# Altium PCB Hydrated_Buffs.PcbDoc
Units mil, origin at the board's own origin, x right, y up, seen from the top; angles counter-clockwise.
Board outline 3496 x 3557 mil, 2 copper layers (Top Layer, Bottom Layer); 108 components, 72 nets, 359 pads, 215 vias.
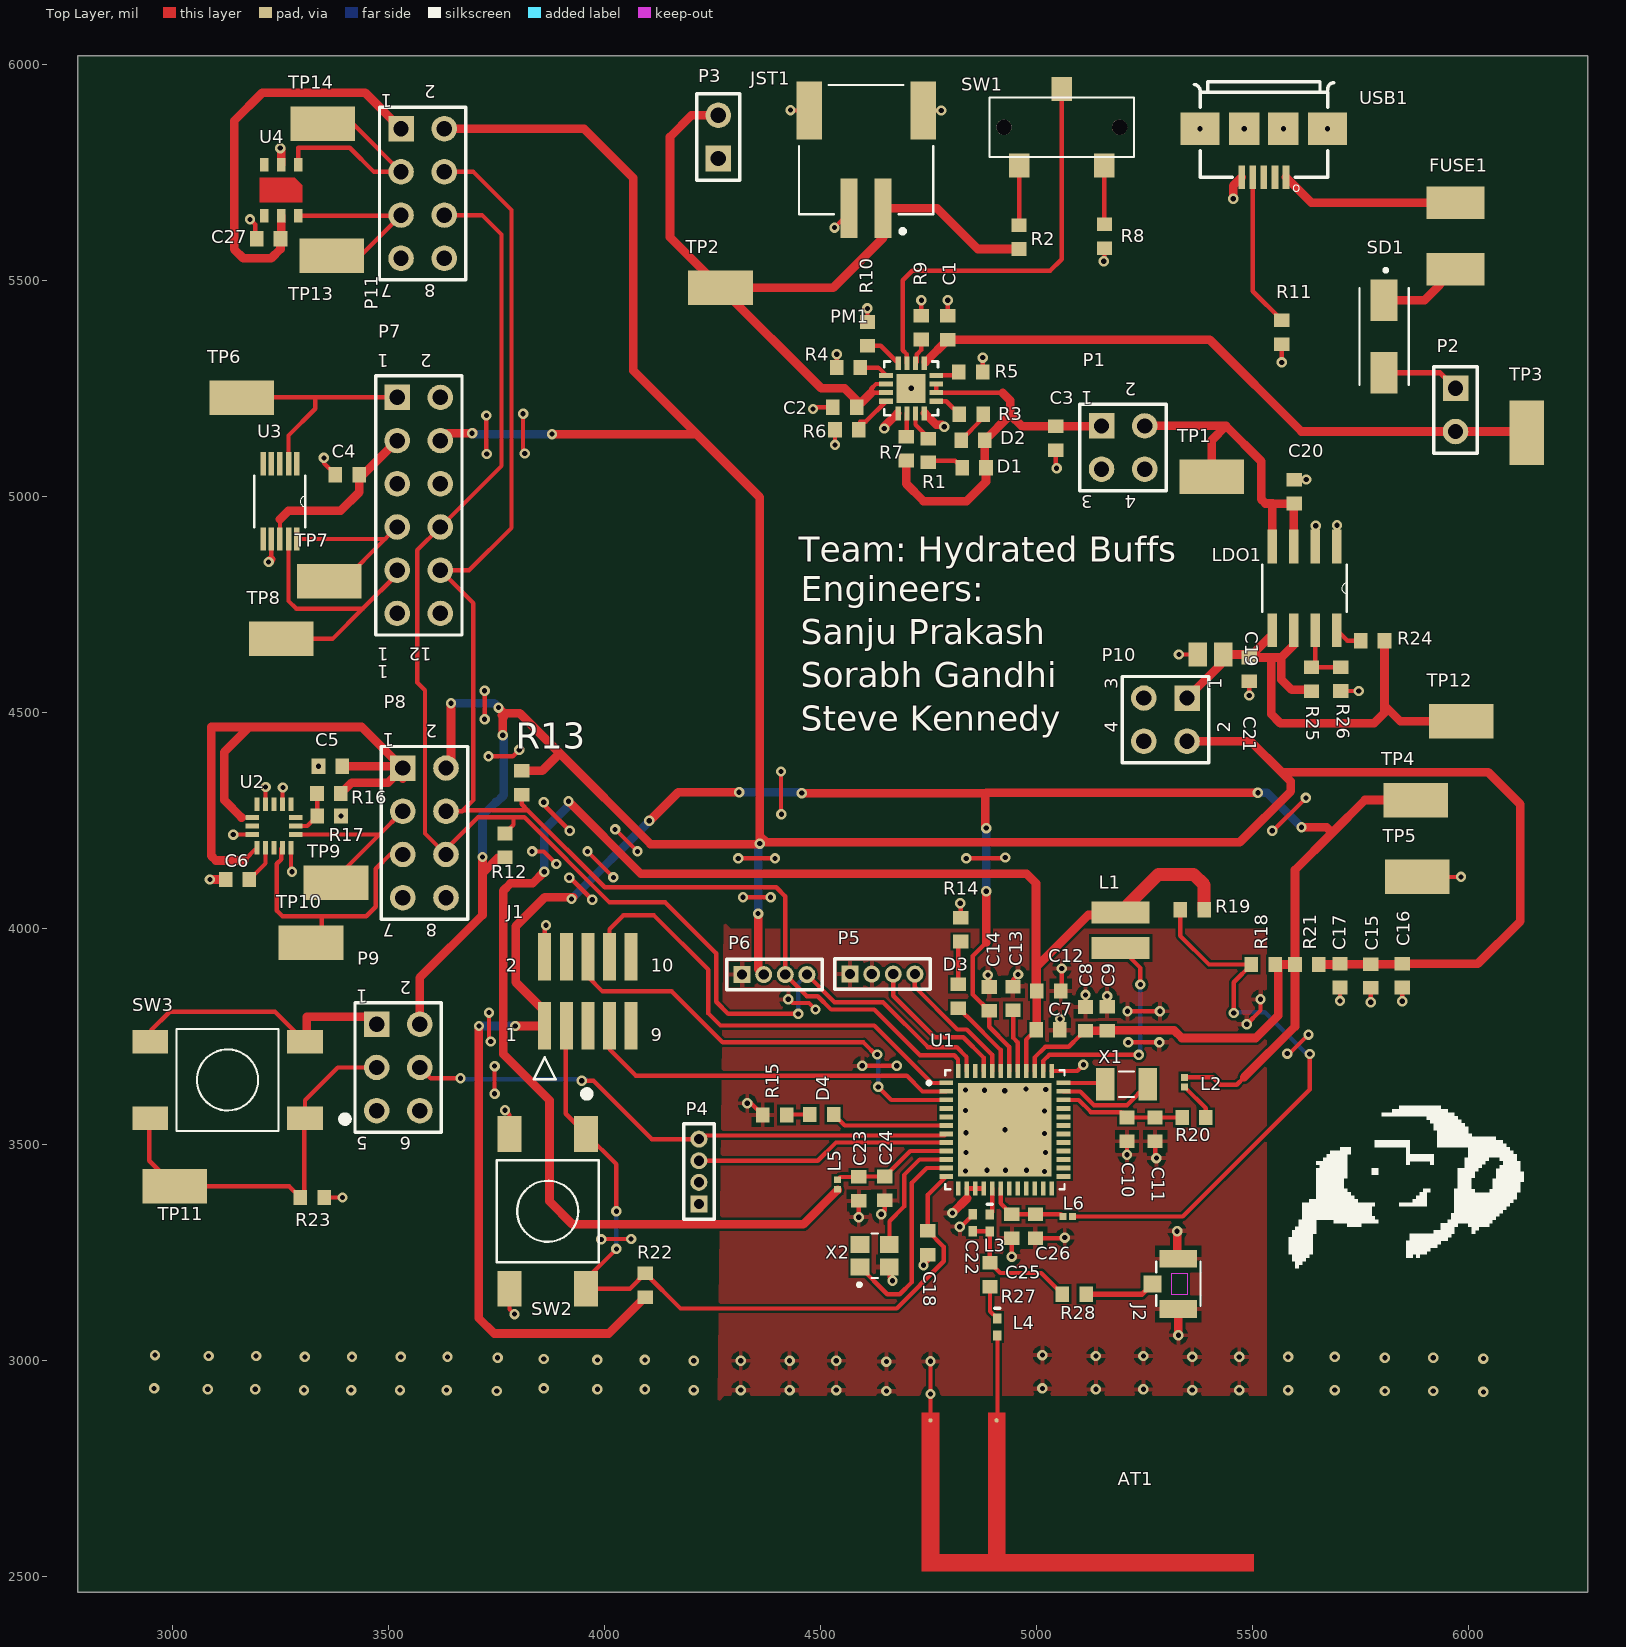
[diagram p0: Top Layer view]
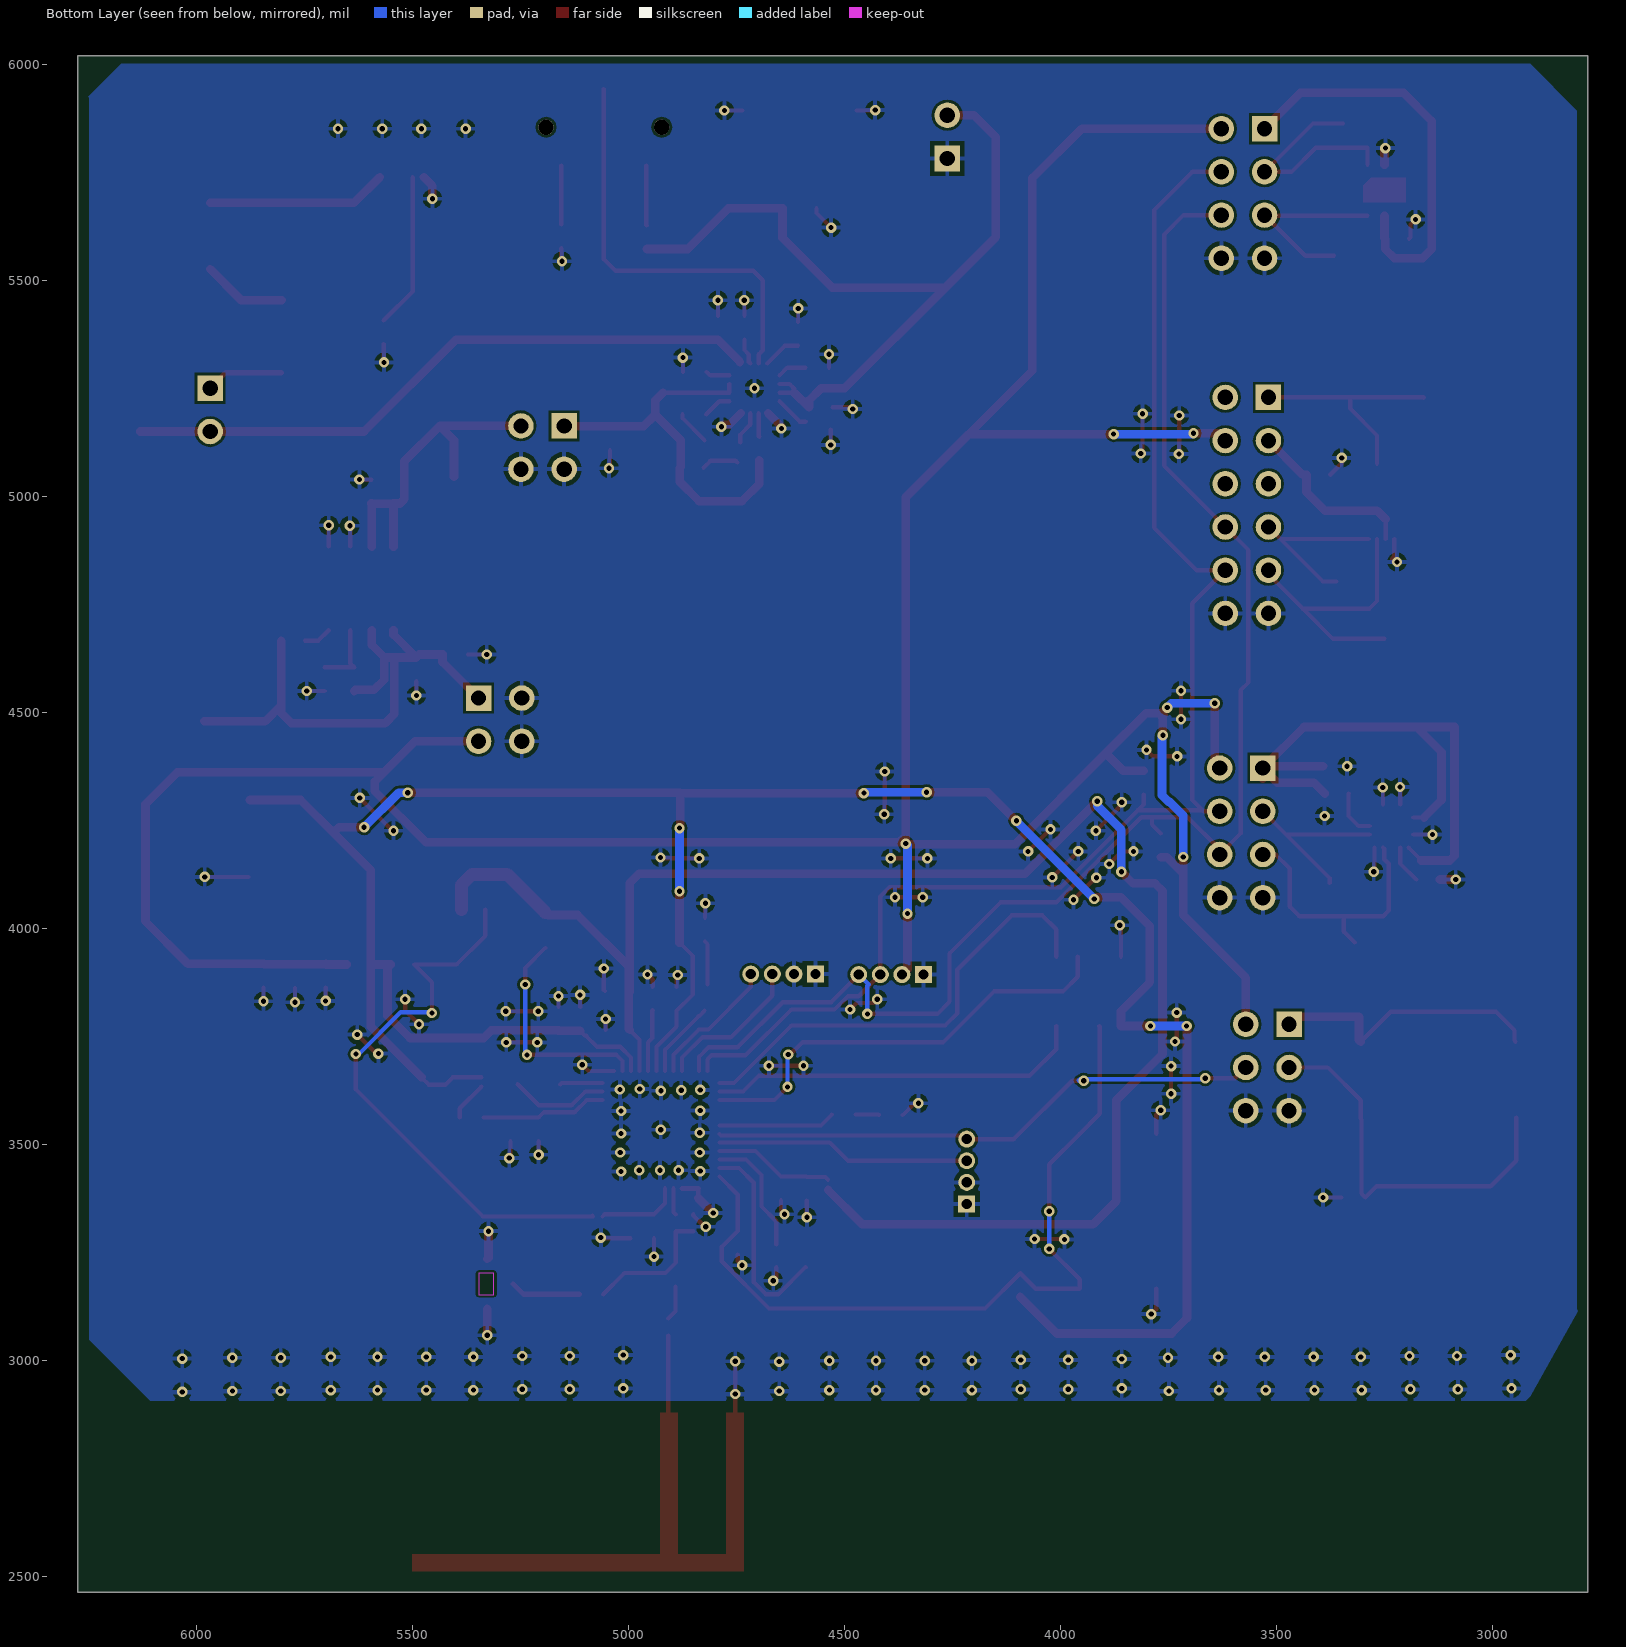
[diagram p1: Bottom Layer view, seen from below]

## Layer stack, top to bottom
Top Solder: solder mask 0.4, Solder Resist, Dk 3.5
Top Layer: signal copper 1.4
Dielectric1: dielectric 12.6, FR-4, Dk 4.8
Bottom Layer: signal copper 1.4
Bottom Solder: solder mask 0.4, Solder Resist, Dk 3.5

## Board outline
2780,2464 2780,6021 6276,6021 6276,2464

## Design rules (kind name [scope] priority, off if disabled: settings)
Clearance [All] p1: gap=6 ignorepadtopadclearanceinfootprint=FALSE except(0: Arc-Hole Track-Hole SMDPad-Hole THPad-Hole Via-Hole Fill-Hole Poly-Hole Region-Hole Text-Hole; 10: Text-Text)
FabricationTestPointUsage TestPointUsage [All] p1: valid=0 allowmultiple=FALSE
FabricationTestpoint Testpoint [All] p1: side=3 testpointundercomponent=TRUE minsize=40 maxsize=100 preferedsize=60 minholesize=0 maxholesize=40 preferedholesize=32 testpointgrid=1 allowsidetop=TRUE allowsidebottom=TRUE usegrid=TRUE gridtolerance=0.01
PolygonConnect [All] p1: connectstyle=Relief reliefconductorwidth=10 reliefentries=4 polygonreliefangle="90 Angle" airgapwidth=10
RoutingVias [All] p1: holewidth=14 width=28 viastyle="Through Hole" minholewidth=10 minwidth=20 maxholewidth=12 maxwidth=24
ShortCircuit [InPadClass('All Pads')] p1: allowed=FALSE
SilkToSolderMaskClearance SilkscreenOverComponentPads [IsPad] p1: minsilkscreentomaskgap=10 clearancetoexposedcopper=TRUE
SolderMaskExpansion [All] p1: expansion=4
Width Power_Width [(InNet('3V3') OR InNet('GND') OR InNet('NetFUSE1_1') OR InNet('NetFUSE1_2') OR InNet('VBC') OR InNet('V_USB') OR InNet('V_REGOUT') OR InNet('V_BATBYPASS') OR InNet('VMCU') OR InNet('VLDO_IN') OR InNet('VDCDC') OR InNet('S1_3V3') OR InNet('S2_3V3') OR InNet('S3_3V3') OR InNet('S4_3V3'))] p1: maxlimit=40 minlimit=10 preferedwidth=20
Width Signal [All] p2: maxlimit=12 minlimit=8 preferedwidth=10
26 further rules are at their usual default settings.

## Classes and differential pairs
component class Si7021: C27 P11 TP13 TP14 U4
component class RF_Antenna: AT1 C22 C23 C24 C25 C26 J2 L3 L4 L5 L6 R26 R27 U1 X1 X2
component class Regulator: C19 C20 C21 LDO1 P10 R22 R23 R26 TP12
component class PushButton: P9 R23 SW3 TP11
component class Power_Decoupling: C7 C8 C9 C10 C11 C12 C13 C14 C15 C16 C17 C18 L1 L2 R18 R20 R21 R22 SW2
component class MMA8452Q: C5 C6 P8 TP9 TP10 U2
component class FDC1004DGST: C4 P7 TP6 TP7 TP8 U3
component class EFR32_Port_Pins: D3 D4 J1 P4 P5 P6 R14 R15 TP4 TP5
component class Battery_Charger: C1 C2 C3 D1 D2 FUSE1 JST1 P1 P2 P3 PM1 R1 R2 R3 R4 R5 R6 R7 R8 R9 R10 R11 SD1 SW1 TP1 TP2 TP3 USB1

## Components (designator, comment, footprint, x,y, rotation, side; value= is the part's Value field where it differs from the comment)
AT1 "RF Antenna" PCBComponent_1 4639.87,2868.61 r0 top
C1 "Cap" 1608[0603] 4794,5391 r270 top value=1uF
C2 "Cap" 1608[0603] 4555.56,5207 r0 top value=10uF
C3 "Cap" 1608[0603] 5044,5135.44 r90 top value=10uF
C4 "Cap" 1608[0603] 3404,5051 r0 top value=1uF
C5 "Cap" 1608[0603] 3365,4376 r0 top value=4.7uF
C6 "Cap" 1608[0603] 3150,4114 r0 top value=0.1uF
C7 "4U7" 1608[0603] 5026,3766 r180 top
C8 "10U" 1608[0603] 5113,3791.44 r270 top
C9 "1U" 1608[0603] 5163,3791.88 r270 top
C10 "10U" 1608[0603] 5209,3535.56 r90 top
C11 "10N" 1608[0603] 5274,3535.56 r90 top
C12 "100N" 1608[0603] 5028,3856 r180 top
C13 "1U" 1608[0603] 4945,3838.56 r270 top
C14 "1U" 1608[0603] 4890,3837.56 r270 top
C15 "100N" 1608[0603] 5773,3890.56 r90 top
C16 "100N" 1608[0603] 5846,3891.56 r90 top
C17 "10U" 1608[0603] 5702,3891.56 r90 top
C18 "100N" 1608[0603] 4748,3273 r90 top
C19 "Cap" C0805 5402,4635 r0 top value=100PF
C20 "Cap" 1608[0603] 5596,5012 r270 top value=0.1uF
C21 "Cap" 1608[0603] 5492,4600.44 r90 top value=10uF
C22 "100pF" 0402 4851.37,3319.32 r270 top
C23 "100P" 1608[0603] 4588,3398 r90 top
C24 "10P" 1608[0603] 4648,3399 r90 top
C25 "220N" 1608[0603] 4942,3311.44 r90 top
C26 "10P" 1608[0603] 4997,3311.44 r90 top
C27 "Cap" 1608[0603] 3222,5597 r0 top value=0.1uF
D1 "LED_PGOOD" 1608[0603] 4855,5067 r180 top
D2 "LED_CHG" 1608[0603] 4852.44,5131 r180 top
D3 "LED0" 1608[0603] 4818,3844 r90 top
D4 "LED1" 1608[0603] 4502.56,3570 r180 top
FUSE1 "Fuse" Fuse 6124.44,5373.77 r90 top
J1 "FTSH-105-01-L-DV-K" *SAMTEC_FTSH-105-01-L-DV-K 3961,3855 r0 top
J2 "UFL Connector" *HRS_U.FL-R-SMT-1(10) 5328,3178 r270 top
JST1 "JST" JST 5120.11,6187.62 r180 top
L1 "4U7" 4u7 5194,3996.66 r90 top
L2 "CBF102WB" *CAPC0603X56N 5342,3645 r270 top
L3 "1N9" 0402-A 4891.37,3319 r270 top
L4 "1N9" 0402-A 4909,3078 r270 top
L5 "BLM18AG601SN1" *CAPC0603X56N 4539,3408 r90 top
L6 "BLM18AG601SN1" *CAPC0603X56N 5072,3334 r180 top
LDO1 "LDO" LDO 5090,5608 r270 top
P1 "Header 2X2H" HDR2X2 5150,5164 r270 top
P2 "Header 2" HDR1X2 5969.44,5251 r270 top
P3 "Header 2" HDR1X2 4263,5783 r90 top
P4 "MHDR1X4" MHDR1X4 4218,3363 r90 top
P5 "MHDR1X4" MHDR1X4 4568,3895 r0 top
P6 "MHDR1X4" MHDR1X4 4318,3894 r0 top
P7 "Header 6X2" HDR2X6 3519.56,5230 r270 top
P8 "Header 4X2" HDR2X4 3532.56,4372 r270 top
P9 "Header 3X2" HDR2X3 3472,3779 r270 top
P10 "Header 2X2H" HDR2X2 5348,4534 r180 top
P11 "Header 4X2" HDR2X4 3528.56,5852 r270 top
PM1 "POWER_IC" Power_management 4469.44,5066 r0 top
R1 "Res1" 1608[0603] 4749,5107 r270 top value=1K
R2 "Res1" 1608[0603] 4959,5601 r270 top value=3.3K
R3 "Res1" 1608[0603] 4848.32,5191 r0 top value=1K
R4 "Res1" 1608[0603] 4564.32,5299 r0 top value=10K
R5 "Res1" 1608[0603] 4847.44,5289 r180 top value=3.12K
R6 "Res1" 1608[0603] 4560.56,5155 r0 top value=100K
R7 "Res1" 1608[0603] 4698,5111.44 r90 top value=10K
R8 "Res1" 1608[0603] 5157,5603 r90 top value=0
R9 "Res1" 1608[0603] 4732.44,5391.56 r270 top value=0
R10 "Res1" 1608[0603] 4608.44,5377 r270 top value=2.21K
R11 "Res1" 1608[0603] 5567.44,5381 r270 top value=0
R12 "Res1" 1608[0603] 3769,4193 r270 top value=4.7K
R13 "Res1" 1608[0603] 3808,4338 r90 top value=4.7K
R14 "Res1" 1608[0603] 4824,3998 r270 top value=1K
R15 "Res1" 1608[0603] 4393.44,3569 r0 top value=1K
R16 "Res1" 1608[0603] 3361.44,4313 r0 top value=10K
R17 "Res1" 1608[0603] 3362,4261 r180 top value=0
R18 "0 OHM" 1608[0603] 5524.44,3917.12 r180 top
R19 "0 OHM" 1608[0603] 5360,4044 r180 top
R20 "Res2" 1608[0603] 5364,3563.12 r180 top value=1K
R21 "0 OHM" 1608[0603] 5625.44,3917.12 r180 top
R22 "Res1" 1608[0603] 4094,3175 r270 top value=10K
R23 "Res1" 1608[0603] 3323,3378 r180 top value=10K
R24 "Res1" 1608[0603] 5777.56,4667 r180 top value=200k
R25 "Res1" 1608[0603] 5636,4577.56 r90 top value=196k
R26 "Res1" 1608[0603] 5704,4578 r270 top value=110k
R27 "0 OHM" 1608[0603] 4892,3199 r270 top
R28 "0 OHM" 1608[0603] 5087,3154 r0 top
SD1 "Diode" *DIOM5225X250N 5804,5371 r270 top
SW1 "SW" SW 4593,5405.42 r0 top
SW2 "Push Button" "Push Button" 3868,3346 r270 top
SW3 "Push Button" "Push Button" 3127,3650 r180 top
TP1 "TP" TP 4845,4761 r0 top
TP2 "TP" TP 3708,5199 r0 top
TP3 "TP" TP 6419.44,4588 r90 top
TP4 "TP" *TP380X203 5877,4298 r0 top
TP5 "TP" *TP380X203 5881,4120 r0 top
TP6 "TP" TP 3720,5514 r180 top
TP7 "TP" TP 3922,5089 r180 top
TP8 "TP" TP 3811,4956 r180 top
TP9 "TP" TP 3938,4391 r180 top
TP10 "TP" TP 3880,4253 r180 top
TP11 "TP" TP 3565,3689 r180 top
TP12 "TP" TP 6543,4765 r180 top
TP13 "TP" TP 3928,5843 r180 top
TP14 "TP" TP 2787,5579 r0 top
U1 "EFR32BG13P632F512GM48" *QFN50P700X700X90-49N 4926.21,3534.83 r0 top
U2 "MMA8452Q1" MMA8452Q1 3234.56,4238 r90 top
U3 "FDC1004DGST" FDC1004DGST 3245.56,4989 r270 top
U4 "SI7021-A20-GM1R" SI7021 3250.56,5709 r270 top
USB1 "USB" USB 6035.72,6167 r180 top
X1 "ECS-.327-12.5-34B-TR" *XTAL_ECS-.327-12.5-34B-TR 5208,3640 r180 top
X2 "CX2520DB38400D0FZGC1" *OSCCC250X200X55N 4625,3243 r90 top

## Footprints (in the part's own frame and the unit in brackets; to place one, negate y for a bottom-side part, rotate by r counter-clockwise, add the part's x,y. Pads: shape width x height; smd on the part's side, far side on the other; paste and mask are expansions set on the pad)
4u7 [mm]
  rect 1.3x3.4 smd: 1(-1.05,0) 2(1.05,0)
0402 [mm] "Chip Capacitor, Body 1.0x0.5mm, IPC High Density"
  rect 0.6x0.5 smd: 1(-0.5,0) 2(0.5,0)
  body extent -0.55,-0.3 0.55,0.3, height 1.3
0402-A [mm] "Chip Inductor, Body 1.0x0.5mm, IPC High Density"
  rect 0.6x0.5 smd: 1(-0.5,0) 2(0.5,0)
  silkscreen extent -1.1,-0.15 -1.1,0.15, body extent -0.55,-0.3 0.55,0.3, height 0.55
1608[0603] [mm] "Chip Capacitor, Body 1.6x0.8mm, IPC High Density"
  rect 0.8x0.9 smd: 1(-0.7,0) 2(0.7,0)
  body extent -0.87,-0.48 0.87,0.48, height 1.3
*CAPC0603X56N [mm]
  rect 0.4x0.42 smd: 1(-0.28,0) 2(0.28,0)
*DIOM5225X250N [mm]
  rect 2.43x1.61 smd: A(2.135,0) C(-2.135,0)
  silkscreen extent -4,-1.45 2.85,1.45
*HRS_U.FL-R-SMT-1(10) [mm]
  rect 1.05x2.2 smd: 1(-1.475,0) 3(1.475,0)
  rect 1x1.05 smd: 2(0,-1.525)
  Keep-Out Layer region: -0.635,0.508 0.635,0.508 0.635,-0.381 -0.635,-0.381
  Keep-Out Layer region: -0.635,0.508 0.635,0.508 0.635,-0.381 -0.635,-0.381
  silkscreen extent -1.3,-1.3 1.3,1.3
*OSCCC250X200X55N [mm]
  rect 0.99x1.09 smd: 1(-0.665,0.865) 2(-0.665,-0.865) 3(0.665,-0.865) 4(0.665,0.865)
  silkscreen extent -1.8,-0.18 1.31,1
*QFN50P700X700X90-49N [mm]
  rect 0.81x0.27 smd: 1(-3.45,2.75) 2(-3.45,2.25) 3(-3.45,1.75) 4(-3.45,1.25) 5(-3.45,0.75) 6(-3.45,0.25) 7(-3.45,-0.25) 8(-3.45,-0.75) 9(-3.45,-1.25) 10(-3.45,-1.75) 11(-3.45,-2.25) 12(-3.45,-2.75) 25(3.45,-2.75) 26(3.45,-2.25) 27(3.45,-1.75) 28(3.45,-1.25) 29(3.45,-0.75) 30(3.45,-0.25) 31(3.45,0.25) 32(3.45,0.75) 33(3.45,1.25) 34(3.45,1.75) 35(3.45,2.25) 36(3.45,2.75)
  rect 0.27x0.81 smd: 13(-2.75,-3.45) 14(-2.25,-3.45) 15(-1.75,-3.45) 16(-1.25,-3.45) 17(-0.75,-3.45) 18(-0.25,-3.45) 19(0.25,-3.45) 20(0.75,-3.45) 21(1.25,-3.45) 22(1.75,-3.45) 23(2.25,-3.45) 24(2.75,-3.45) 37(2.75,3.45) 38(2.25,3.45) 39(1.75,3.45) 40(1.25,3.45) 41(0.75,3.45) 42(0.25,3.45) 43(-0.25,3.45) 44(-0.75,3.45) 45(-1.25,3.45) 46(-1.75,3.45) 47(-2.25,3.45) 48(-2.75,3.45)
  rect 5.5x5.5 smd: 49(0,0)
  silkscreen extent -4.56,-3.5 3.5,3.5
*SAMTEC_FTSH-105-01-L-DV-K [mil]
  rect 30x110 smd: 1(-100,-80) 2(-100,80) 3(-50,-80) 4(-50,80) 5(0,-80) 6(0,80) 7(50,-80) 8(50,80) 9(100,-80) 10(100,80)
  silkscreen extent -125,-203 -75,-153
*TP380X203 [mm]
  rect 3.8x2.03 smd: 1(0,0)
*XTAL_ECS-.327-12.5-34B-TR [mm]
  rect 1.1x1.9 smd: 1(-1.25,0) 2(1.25,0)
  silkscreen extent -0.44,-0.75 0.44,0.75
C0805 [mm] "Chip Capacitor, Body 2.0x1.3mm, IPC High Density"
  rect 1.1x1.4 smd: 1(-0.75,0) 2(0.75,0)
  body extent -1.1,-0.72 1.1,0.72, height 1.4
FDC1004DGST [mil]
  rect 54x13 smd: 1(-87.08,41.6) 2(-87.08,22.6) 3(-87.08,2.6) 4(-87.08,-17.4) 5(-87.08,-36.4) 6(86.92,-36.4) 7(86.92,-17.4) 8(86.92,2.6) 9(86.92,22.6) 10(86.92,41.6)
  silkscreen extent -59,-56 59,62
Fuse [mm]
  rect 1.9x3.4 smd: 1(3.892,3.937) 2(7.792,3.937)
HDR1X2 [mm] "Connector; Header; 2 Position"
  rect 1.5x1.5 hole 0.9: 1(0,0)
  round 1.5 hole 0.9: 2(2.54,0)
  silkscreen extent -1.27,-1.27 3.81,1.27
HDR2X2 [mm] "Connector; Header; 2x2 Position"
  rect 1.5x1.5 hole 0.9: 1(0,0)
  round 1.5 hole 0.9: 2(0,2.54) 3(2.54,0) 4(2.54,2.54)
  silkscreen extent -1.27,-1.27 3.81,3.81
HDR2X3 [mm] "Connector; Header; 3x2 Position"
  rect 1.5x1.5 hole 0.9: 1(0,0)
  round 1.5 hole 0.9: 2(0,2.54) 3(2.54,0) 4(2.54,2.54) 5(5.08,0) 6(5.08,2.54)
  silkscreen extent -1.27,-1.27 6.35,3.81
HDR2X4 [mm] "Connector; Header; 4x2 Position"
  rect 1.5x1.5 hole 0.9: 1(0,0)
  round 1.5 hole 0.9: 2(0,2.54) 3(2.54,0) 4(2.54,2.54) 5(5.08,0) 6(5.08,2.54) 7(7.62,0) 8(7.62,2.54)
  silkscreen extent -1.27,-1.27 8.89,3.81
HDR2X6 [mm] "Connector; Header; 6x2 Position"
  rect 1.5x1.5 hole 0.9: 1(0,0)
  round 1.5 hole 0.9: 2(0,2.54) 3(2.54,0) 4(2.54,2.54) 5(5.08,0) 6(5.08,2.54) 7(7.62,0) 8(7.62,2.54) 9(10.16,0) 10(10.16,2.54) 11(12.7,0) 12(12.7,2.54)
  silkscreen extent -1.27,-1.27 13.97,3.81
JST [mm]
  rect 1x3.5 smd: 1(12.081,13.208) 2(14.081,13.208)
  rect 1.5x3.4 smd: S1(9.731,7.458) S2(16.431,7.458)
  silkscreen extent 9.13,5.96 17.03,14.66
LDO [mil]
  rect 78x22 smd: 1(723,605) 2(723,555) 3(723,505) 4(723,455) 5(917,455) 6(917,505) 7(917,555) 8(917,605)
  silkscreen extent 766,432 874,628
MHDR1X4 [mm] "Connector; Header; 4 Position"
  rect 1x1 hole 0.6: 1(0,0)
  round 1 hole 0.6: 2(1.27,0) 3(2.54,0) 4(3.81,0)
  silkscreen extent -0.9,-0.9 4.71,0.9
MMA8452Q1 [mil] "QFN-16_0.5MM"
  rect 31.5x11.81 smd: 1(-50.2,39.37) 2(-50.2,19.69) 3(-50.2,0) 4(-50.2,-19.69) 5(-50.2,-39.37) 9(50.2,-39.37) 10(50.2,-19.69) 11(50.2,0) 12(50.2,19.69) 13(50.2,39.37)
  rect 11.81x31.5 smd: 6(-19.69,-50.2) 7(0,-50.2) 8(19.69,-50.2) 14(19.69,50.2) 15(0,50.2) 16(-19.69,50.2)
PCBComponent_1 [mil]
  round 10 smd paste-10 mask-10: 1(267.13,-6.61) 2(114.13,-6.75)
  Top Layer region: 94.45,-356.1 862.17,-356.1 862.17,-315.97 287.45,-315.97 287.45,11.1 247.45,11.1 247.45,-315.97 134.45,-315.97 134.45,11.1 114.45,11.1 94.45,11.1
Power_management [mil]
  rect 32x12 smd: 1(182,215) 2(182,195) 3(182,175) 4(182,155) 9(298,155) 10(298,175) 11(298,195) 12(298,215)
  rect 12x32 smd: 5(210,127) 6(230,127) 7(250,127) 8(270,127) 13(270,243) 14(250,243) 15(230,243) 16(210,243)
  rect 67x67 smd: 17(240,185)
  silkscreen extent 178,123 302,247
"Push Button" [mm]
  rect 2.1x1.4 smd: 1(-4.55,2.25) 2(4.55,2.25) 3(-4.55,-2.25) 4(4.55,-2.25)
  silkscreen extent -7.1,-3 3,3
SI7021 [mil]
  rect 31.5x19.69 smd: GND(-59.49,0.47) NC@3(-59.49,-38.9) NC@4(58.63,-38.9) SCL(58.63,39.84) SDA(-59.49,39.84) VDD(58.63,0.47)
  Top Layer region: 27.13,-48.74 -29.96,-48.74 -29.96,31.97 -12.24,49.68 27.13,49.68
SW [mm]
  rect 1.2x1.4 smd: 1(9.311,9.18) 2(11.811,13.68) 3(14.311,9.18)
  round 0.9 hole 0.9 unplated: None(8.411,11.43) None(15.211,11.43)
  silkscreen extent 7.56,9.68 16.06,13.18
TP [mil]
  rect 149.61x79.92 smd: 1(560,285)
USB [mm]
  rect 0.4x1.4 smd: 1(11.654,10.851) 2(12.304,10.851) 3(12.954,10.851) 4(13.604,10.851) 5(14.254,10.851)
  rect 2.3x1.9 smd: 6(9.204,8.001) 9(16.704,8.001)
  rect 1.8x1.9 smd: 7(11.804,8.001) 8(14.104,8.001)
  silkscreen extent 8.86,5.25 17.05,11.68

## Part data
C1 C2 C3 C20 C21: "10000pF ±10% 50V Ceramic Capacitor X7R 0603 (1608 Metric)", Digi-Key Part Number=1276-1009-1-ND, Manufacturer="Samsung Electro-Mechanics", Manufacturer Part Number=CL10B103KB8NNNC, DigiKeyURL=https://www.digikey.com/product-detail/en/samsung-electro-mechanics/CL10B103KB8NNNC/1276-1009-1-ND/3889095
C4: "Capacitor", Digi-Key Part Number=1276-6524-1-ND, Manufacturer="Samsung Electro-Mechanics", Manufacturer Part Number=CL10B105MO8NNWC, DigiKeyURL=https://www.digikey.com/product-detail/en/samsung-electro-mechanics/CL10B105MO8NNWC/1276-6524-1-ND/5961383
C5: "Capacitor", Digi-Key Part Number=1276-2087-1-ND, Manufacturer="Samsung Electro-Mechanics", Manufacturer Part Number=CL10B475KQ8NQNC, DigiKeyURL=https://www.digikey.com/product-detail/en/samsung-electro-mechanics/CL10B475KQ8NQNC/1276-2087-1-ND/3890173
C6 C27: "Capacitor", Digi-Key Part Number=1276-1005-1-ND, Manufacturer="Samsung Electro-Mechanics", Manufacturer Part Number=CL10B104KO8NNNC, DigiKeyURL=https://www.digikey.com/product-detail/en/samsung-electro-mechanics/CL10B104KO8NNNC/1276-1005-1-ND/3889091
C7: library part Cap, "CAP CER 4.7UF 25V X5R 0603", Digi-Key Part Number=1276-1900-1-ND, Manufacturer="Samsung Electro-Mechanics", Manufacturer Part Number=CL10A475KA8NQNC, DigiKeyURL=https://www.digikey.com/product-detail/en/samsung-electro-mechanics/CL10A475KA8NQNC/1276-1900-1-ND/3889986
C8 C10 C17: library part Cap, "CAP CER 10UF 6.3V X5R 0603", Digi-Key Part Number=1276-1119-1-ND, Manufacturer="Samsung Electro-Mechanics", Manufacturer Part Number=CL10A106MQ8NNNC, DigiKeyURL=https://www.digikey.com/product-detail/en/samsung-electro-mechanics/CL10A106MQ8NNNC/1276-1119-1-ND/3889205
C9 C13 C14: library part Cap, "CAP CER 1UF 25V X5R 0603", Digi-Key Part Number=1276-1102-1-ND, Manufacturer="Samsung Electro-Mechanics", Manufacturer Part Number=CL10A105KA8NNNC, DigiKeyURL=https://www.digikey.com/product-detail/en/samsung-electro-mechanics/CL10A105KA8NNNC/1276-1102-1-ND/3889188
C11: library part Cap, "CAP CER 10000PF 16V X7R 0603", Digi-Key Part Number=399-7841-1-ND, Manufacturer=KEMET, Manufacturer Part Number=C0603C103K4RACTU, DigiKeyURL=https://www.digikey.com/product-detail/en/kemet/C0603C103K4RACTU/399-7841-1-ND/3471564
C12 C15 C16 C18: library part Cap, "CAP CER 0.1UF 16V X7R 0603", Digi-Key Part Number=1276-1005-1-ND, Manufacturer="Samsung Electro-Mechanics", Manufacturer Part Number=CL10B104KO8NNNC, DigiKeyURL=https://www.digikey.com/product-detail/en/samsung-electro-mechanics/CL10B104KO8NNNC/1276-1005-1-ND/3889091
C19: "CAP CER 100PF 50V C0G/NP0 0805", Digi-Key Part Number=399-1122-1-ND, Manufacturer=KEMET, Manufacturer Part Number=C0805C101J5GACTU, DigiKeyURL=https://www.digikey.com/product-detail/en/kemet/C0805C101J5GACTU/399-1122-1-ND/411397
C22: library part "Cap Semi", "CAP CER 1.5PF 50V C0G/NP0 0402", Manufacturer="Murata Electronics", Manufacturer Part Number=GJM1555C1H1R5WB01D, Mouser Part Number=81-GJM1555C1H1R5WB1D, MouserURL=https://www.mouser.com/ProductDetail/Murata-Electronics/GJM1555C1H1R5WB01D?qs=YLLXL5qGyDucsRPozQcunA%3D%3D
C23: library part Cap, "CAP CER 100PF 16V X7R 0603", Digi-Key Part Number=478-6207-1-ND, Manufacturer="AVX Corporation", Manufacturer Part Number=0603YC101KAT2A, DigiKeyURL=https://www.digikey.com/product-detail/en/avx-corporation/0603YC101KAT2A/478-6207-1-ND/2391406
C24 C26: library part Cap, "CAP CER 10PF 50V C0G/NPO 0603", Digi-Key Part Number=311-1058-1-ND, Manufacturer=Yageo, Manufacturer Part Number=CC0603JRNPO9BN100, DigiKeyURL=https://www.digikey.com/product-detail/en/yageo/CC0603JRNPO9BN100/311-1058-1-ND/302968
C25: library part Cap, "Capacitor", Digi-Key Part Number=587-1249-1-ND, Manufacturer="Taiyo Yuden", Manufacturer Part Number=EMK107B7224KA-T, DigiKeyURL=https://www.digikey.com/product-detail/en/taiyo-yuden/EMK107B7224KA-T/587-1249-1-ND/931026
D1 D3 D4: library part LED2, "LED GREEN DIFFUSED 0603 SMD", Digi-Key Part Number=475-3118-1-ND, Manufacturer="OSRAM Opto Semiconductors Inc.", Manufacturer Part Number="LG L29K-F2J1-24-Z", DigiKeyURL=https://www.digikey.com/product-detail/en/osram-opto-semiconductors-inc/LG-L29K-F2J1-24-Z/475-3118-1-ND/4899549
D2: library part LED2, "Blue 470nm LED Indication - Discrete 2.85V 0603 (1608 Metric)", Digi-Key Part Number=475-2816-1-ND, Manufacturer="OSRAM Opto Semiconductors Inc.", Manufacturer Part Number="LB Q39G-L2OO-35-1", DigiKeyURL=https://www.digikey.com/product-detail/en/osram-opto-semiconductors-inc/LB-Q39G-L2OO-35-1/475-2816-1-ND/2176355
FUSE1: "PTC RESET FUSE 15V 500MA 1812", Digi-Key Part Number=MF-MSMF050-2CT-ND, Manufacturer="Bourns Inc.", Manufacturer Part Number=MF-MSMF050-2, DigiKeyURL=https://www.digikey.com/product-detail/en/bourns-inc/MF-MSMF050-2/MF-MSMF050-2CT-ND/662842, Snapeda_Url=https://www.snapeda.com/parts/MF-MSMF050-2/Bourns/view-part/?ref=search&t=MF-MSMF050-2
J1: "CONN HEADER SMD 10POS 1.27MM", Digi-Key Part Number=SAM8799-ND, Manufacturer="Samtec Inc.", DigiKeyURL=https://www.digikey.com/product-detail/en/samtec-inc/FTSH-105-01-L-DV-K/SAM8799-ND/1875039, Manufacturer Part Number=FTSH-105-01-L-DV-K, SnapEDA_Link=https://www.snapeda.com/parts/FTSH-105-01-L-DV-K-TR/Samtec%20Inc./view-part/?ref=snap
J2: library part U.FL-R-SMT-1(10), "U.FL Series 6 Ghz 50 Ohm Ultra-small SMT Coaxial Cable Receptacle", Manufacturer="Hirose Connector", Mouser Part Number=798-U.FL-R-SMT-110, Manufacturer Part Number=U.FL-R-SMT-1(10), MouserURL=https://www.mouser.com/ProductDetail/Hirose-Connector/UFL-R-SMT-110?qs=kL1ClTr6oBoOdtqlGQpQrQ%3D%3D
JST1 SW1: "SWITCH SLIDE SPDT 200MA 12V", Digi-Key Part Number=563-1318-1-ND, Manufacturer="Nidec Copal Electronics", Manufacturer Part Number=CL-SB-12B-01T, DigiKeyURL=https://www.digikey.com/product-detail/en/nidec-copal-electronics/CL-SB-12B-01T/563-1318-1-ND/3507878, Snapeda_Url=https://www.snapeda.com/parts/CL-SB-12B-01T/Nidec%20Copal/view-part/?ref=search&t=CL-SB-12B-01T
L1: library part Inductor, "FIXED IND 4.7UH 1.25A 130 MOHM", Manufacturer="Murata Electronics", Manufacturer Part Number=LQH3NPN4R7MM0L, Mouser Part Number=81-LQH3NPN4R7MM0L, MouserURL=https://www.mouser.com/ProductDetail/Murata-Electronics/LQH3NPN4R7MM0L?qs=MY6wChARw2xsFxTl%252BVh9Ew%3D%3D
L2: library part COMPONENT_1, "FERRITE BEAD 1 KOHM 0603 1LN", Digi-Key Part Number=732-4484-1-ND, Manufacturer="Wurth Electronics Inc.", Manufacturer Part Number=74279266, DigiKeyURL=https://www.digikey.com/product-detail/en/wurth-electronics-inc/74279266/732-4484-1-ND/3907313
L3 L4: library part Inductor, "FIXED IND 1.9NH 220MA 300 MOHM", Manufacturer="Murata Electronics", Manufacturer Part Number=LQP15MN1N9W02D, Mouser Part Number=81-LQP15MN1N9W02D, MouserURL=https://www.mouser.com/ProductDetail/Murata-Electronics/LQP15MN1N9W02D?qs=gNAzN4OIlxvRECMB25Zmrw%3D%3D
L5 L6: library part "EMI Filter", Manufacturer="Murata Electronics", Manufacturer Part Number=BLM18AG601SN1D, Mouser Part Number=81-BLM11A601S, MouserURL=https://www.mouser.com/ProductDetail/Murata-Electronics/BLM18AG601SN1D?qs=sGAEpiMZZMtdyQheitOmRV9%252B5BLdsWKJfntqGQ3IlAM%3D
LDO1: "IC REG LINEAR 3.3V 750MA 8SOIC", Digi-Key Part Number=296-2792-5-ND, Manufacturer="Texas Instruments", Manufacturer Part Number=TPS77833D, DigiKeyURL=https://www.digikey.com/product-detail/en/texas-instruments/TPS77833D/296-2792-5-ND/306665, Snapeda_Url=https://www.snapeda.com/parts/TPS77833D/Texas%20Instruments/view-part/?ref=search&t=TPS77833D
P1 P2 P3 P10: "CONN HEADER VERT 8POS 2.54MM", Digi-Key Part Number=A121467-ND, Manufacturer="TE Connectivity AMP Connectors", Manufacturer Part Number=5-146256-4, DigiKeyURL=https://www.digikey.com/product-detail/en/te-connectivity/5-146256-4/A121467-ND/2275818
P4 P5 P6: "CONN HEADER VERT 4POS 2.54MM", Digi-Key Part Number=732-5317-ND, Manufacturer="Würth Elektronik", Manufacturer Part Number=61300411121, DigiKeyURL=https://www.digikey.com/product-detail/en/w-rth-elektronik/61300411121/732-5317-ND/4846827
P7: "Header, 6-Pin, Dual row", Digi-Key Part Number=609-3237-ND, Manufacturer="Amphenol ICC (FCI)", Manufacturer Part Number=67997-212HLF, DigiKeyURL=https://www.digikey.com/product-detail/en/amphenol-icc-fci/67997-212HLF/609-3237-ND/1878564
P8 P11: "Header, 4-Pin, Dual row", Digi-Key Part Number=A121467-ND, Manufacturer="TE Connectivity", Manufacturer Part Number=5-146256-4, DigiKeyURL=https://www.digikey.com/product-detail/en/te-connectivity/5-146256-4/A121467-ND/2275818
P9: "Header, 3-Pin, Dual row", Digi-Key Part Number=609-3237-ND, Manufacturer="Amphenol ICC (FCI)", Manufacturer Part Number=67997-212HLF, DigiKeyURL=https://www.digikey.com/product-detail/en/amphenol-icc-fci/67997-212HLF/609-3237-ND/1878564
PM1: "IC LI-ION CHARGE MGMT 16-QFN", Digi-Key Part Number=296-38874-1-ND, Manufacturer="Texas Instruments", Manufacturer Part Number=BQ24075RGTR, DigiKeyURL=https://www.digikey.com/products/en?keywords=296-38874-1-ND, Snapeda_Url=https://www.snapeda.com/parts/BQ24075RGTT/Texas%20Instruments/view-part/?ref=snap
R1 R2 R3 R4 R6 R7 R14 R15 R24 R25 R26: "10 kOhms ±1% 0.125W, 1/8W Chip Resistor 0603 (1608 Metric) Anti-Sulfur, Moisture Resistant Thin Film", Digi-Key Part Number=RNCP0603FTD10K0CT-ND, Manufacturer="Stackpole Electronics Inc", Manufacturer Part Number=RNCP0603FTD10K0, DigiKeyURL=https://www.digikey.com/product-detail/en/stackpole-electronics-inc/RNCP0603FTD10K0/RNCP0603FTD10K0CT-ND/2240478
R5: "10 kOhms ±1% 0.125W, 1/8W Chip Resistor 0603 (1608 Metric) Anti-Sulfur, Moisture Resistant Thin Film", Digi-Key Part Number=311-2562-1-ND, Manufacturer=Yageo, Manufacturer Part Number=RT0603DRE073K12L, DigiKeyURL=https://www.digikey.com/product-detail/en/yageo/RT0603DRE073K12L/311-2562-1-ND/6128981
R8 R9 R11 R17: "RES SMD 0 OHM JUMPER 1/10W 0603", Digi-Key Part Number=311-0.0GRCT-ND, Manufacturer=Yageo, Manufacturer Part Number=RC0603JR-070RL, DigiKeyURL=https://www.digikey.com/product-detail/en/yageo/RC0603JR-070RL/311-0.0GRCT-ND/729622
R10: "10 kOhms ±1% 0.125W, 1/8W Chip Resistor 0603 (1608 Metric) Anti-Sulfur, Moisture Resistant Thin Film", Digi-Key Part Number=P2.21KHCT-ND, Manufacturer="Panasonic Electronic Components", Manufacturer Part Number=ERJ-3EKF2211V, DigiKeyURL=https://www.digikey.com/product-detail/en/panasonic-electronic-components/ERJ-3EKF2211V/P2.21KHCT-ND/198223
R12 R13: "RES SMD 4.7K OHM 5% 1/10W 0603", Digi-Key Part Number=311-4.7KGRCT-ND, Manufacturer=Yageo, Manufacturer Part Number=RC0603JR-074K7L, DigiKeyURL=https://www.digikey.com/product-detail/en/yageo/RC0603JR-074K7L/311-4.7KGRCT-ND/729732
R16 R22 R23: "RES 10K OHM 1% 1/8W 0603", Digi-Key Part Number=RNCP0603FTD10K0CT-ND, Manufacturer="Stackpole Electronics Inc", Manufacturer Part Number=RNCP0603FTD10K0, DigiKeyURL=https://www.digikey.com/product-detail/en/stackpole-electronics-inc/RNCP0603FTD10K0/RNCP0603FTD10K0CT-ND/2240478
R18 R19 R21 R27 R28: library part Res2, "RES SMD 0 OHM JUMPER 1/10W 0603", Digi-Key Part Number=311-0.0GRCT-ND, Manufacturer=Yageo, Manufacturer Part Number=RC0603JR-070RL, DigiKeyURL=https://www.digikey.com/product-detail/en/yageo/RC0603JR-070RL/311-0.0GRCT-ND/729622
R20: "RES SMD 1K OHM 5% 1/10W 0603", Digi-Key Part Number=311-1.0KGRCT-ND, Manufacturer=Yageo, Manufacturer Part Number=RC0603JR-071KL, DigiKeyURL=https://www.digikey.com/product-detail/en/yageo/RC0603JR-071KL/311-1.0KGRCT-ND/729624
SD1: "DIODE SCHOTTKY 40V 1A DO214AC", Digi-Key Part Number=641-1015-1-ND, Manufacturer="Comchip Technology", Manufacturer Part Number=CDBA140-G, DigiKeyURL=https://www.digikey.com/product-detail/en/comchip-technology/CDBA140-G/641-1015-1-ND/1121137
SW2 SW3: "SWITCH TACTILE SPST-NO 0.05A 24V", Digi-Key Part Number=450-2058-1-ND, Manufacturer="TE Connectivity ALCOSWITCH Switches", Manufacturer Part Number=FSM6JSMATR, DigiKeyURL=https://www.digikey.com/products/en?keywords=450-2058-1-ND
TP1 TP2 TP3 TP4 TP5 TP6 TP7 TP8 TP9 TP10 TP11 TP12 TP13 TP14: "PC TEST POINT MINIATURE", Digi-Key Part Number=36-5019CT-ND, Manufacturer="Keystone Electronics", Manufacturer Part Number=5019, DigiKeyURL=https://www.digikey.com/product-detail/en/keystone-electronics/5019/36-5019CT-ND/3907344?utm_source=snapeda&utm_medium=aggregator&utm_campaign=symbol, Snapeda_Url=https://www.snapeda.com/parts/5019/Keystone%20Electronics/view-part/?ref=search&t=5019
U1: library part EFR32BG13, "MCU", Manufacturer="Silicon Labs", Manufacturer Part Number=EFR32BG13P632F512GM48-BR, Mouser Part Number=634-EFR32BG13P632-BR, CompDescription="Data Sheet", CompURL=https://www.silabs.com/documents/public/data-sheets/efr32bg13-datasheet.pdf, MouserURL=https://www.mouser.com/ProductDetail/Silicon-Labs/EFR32BG13P632F512GM48-BR?qs=5aG0NVq1C4xCQ7DNn6l3Yw%3D%3D
U2: library part MMA8452Q, "ACCELEROMETER 2-8G I2C 16QFN", Digi-Key Part Number=MMA8452QR1CT-ND, Manufacturer="NXP USA Inc.", Manufacturer Part Number=MMA8452QR1, DigiKeyURL=https://www.digikey.com/products/en/sensors-transducers/motion-sensors-accelerometers/515?k=MMA8452Q&k=&pkeyword=MMA8452Q&sv=0&pv7=2&sf=0&FV=ffe00203&quantity=&ColumnSort=0&page=1&stock=1&datasheet=1&pageSize=25, Snapeda_Url=https://www.snapeda.com/parts/MMA8452QR1/NXP%20USA/view-part/?ref=search&t=MMA8452QR1
U3: "CAPACITIVE SENSING SOLUTIONS", Digi-Key Part Number=296-49639-1-ND, Manufacturer="Texas Instruments", DigiKeyURL=https://www.digikey.com/products/en/integrated-circuits-ics/interface-sensor-capacitive-touch/560?k=FDC1004DGST&k=&pkeyword=FDC1004DGST&sv=0&pv7=2&sf=0&quantity=&ColumnSort=0&page=1&stock=1&datasheet=1&pageSize=25, Manufacturer Part Number=FDC1004DGST, Snapeda_Url=https://www.snapeda.com/parts/FDC1004DGST/Texas%20Instruments/view-part/?ref=search&t=FDC1004DGST
U4: library part SI7021, "SENS HUMID/TEMP 3.6V I2C 2% 6DFN", Digi-Key Part Number=336-4380-1-ND, Manufacturer="Silicon Labs", DigiKeyURL=https://www.digikey.com/product-detail/en/silicon-labs/SI7021-A20-GM1R/336-4380-1-ND/8038299, Manufacturer Part Number=SI7021-A20-GM1R, Snapeda_Url=https://www.snapeda.com/parts/SI7021-A20-GM1R/Silicon%20Labs/view-part/?ref=search&t=SI7021-A20-GM1R
USB1: "CONN RCPT USB2.0 MICRO AB SMD RA", Digi-Key Part Number=609-4053-1-ND, Manufacturer="Amphenol ICC (FCI)", Manufacturer Part Number=10104111-0001LF, DigiKeyURL=https://www.digikey.com/product-detail/en/amphenol-fci/10104111-0001LF/609-4053-1-ND/2350359?utm_source=snapeda&utm_medium=aggregator&utm_campaign=symbol, Snapedu_Url=https://www.snapeda.com/parts/10104111-0001LF/Amphenol%20ICC/view-part/?ref=snap
X1: "Crystal 0.032768MHz ±20ppm _Tol_ 12.5pF Flexural 70000Ohm 2-Pin Mini-SMD T/R", Manufacturer=ECS, Mouser Part Number=520-327-12.5-34B, MouserURL=https://www.mouser.com/ProductDetail/ECS/ECS-327-125-34B-TR?qs=xCP1SmiXvZHPyAjhnmNtEw%3D%3D
X2: "Crystal 38.4MHz 8pF 4-Pin SMD T/R", Manufacturer="Kyocera Electronic Components", Mouser Part Number=581-CX2520DB3D0FZGC1, Manufacturer Part Number=CX2520DB38400D0FZGC1, MouserURL=https://www.mouser.com/ProductDetail/Kyocera-Electronic-Components/CX2520DB38400D0FZGC1?qs=BybUIy1AcUarvw5E5YY0vQ%3D%3D

## Via types
v1: diameter 24, hole 12, Top Layer to Bottom Layer, 215 vias

## Nets (pads, with @x,y where several pads share a name; then routed paths per layer and width w, separated by ;. In a path a pad name is that pad's centre, name@x,y a point inside that pad or via, vN(x,y) a via of type N, cw(c..) or ccw(c..) an arc to the next point about the centre after c; other vN are vias at no path point)
3V3: C15.2 C16.2 C17.2 P6.2 P7.4 P8.2 P9.2 P10.2 P11.2 R12.2 R13.2 R21.1 | length 8196.7
  Top Layer w10: C16.2@5845,3918.12 C16.2
  Top Layer w20: P9.2 3572,3887 3717,4032 3717,4128 ; P7.4 3636.56,5147 v1(3693,5147) v1@3695,5149 ; P11.2 3952,5852 4066,5738 4066,5292 4359,4999 ; P8.2 3644,4383.44 v1(3644,4522) ; v1(3717,4166) 3717,4128 ; v1(3754,4512) 3767,4499 ; v1(3764,4448) 3764,4488 3766,4490 3762,4494 3767,4499 ; R12.2 3754.44,4165.44 3717,4128 ; R13.2 3855.56,4365.56 3896,4406 ; v1(3878,5145) 4213,5145 4359,4999 ; v1(4355,4035) 4355,3907 P6.2 ; P10.2 5495,4434 5567,4362 ; R21.1 5700,3917.12 C17.2 5703,3918.12 C15.2 C16.2@5845,3918.12 ; C16.2 6021.12,3919.12 6119,4017 6119,4288 6045,4362 5567,4362 ; 3767,4499 3803,4499 3896,4406 ; 3896,4406 4106,4196 4358,4196 v1(4359,4197) 4359,4215 ; 4359,4215 4374,4200 5470,4200 5588,4318 5588,4341 5567,4362 ; 4359,4215 4359,4999
  Bottom Layer w20: v1(3644,4522) 3744,4522 v1(3754,4512) ; v1(3693,5147) 3695,5145 v1(3878,5145) ; v1(3717,4166) 3717,4262.4 3748.3,4293.7 3749.5,4292.5 3766,4309 3766,4446 v1(3764,4448) ; v1(4355,4035) 4355,4071.69 ; 4355,4075.69 4355,4193 v1(4359,4197)
CIN1: P7.1 TP6.1 U3.2 | length 539.5
  Top Layer w10: TP6.1 3161,5230 3330,5230 ; U3.2 3268.16,5141.84 3330,5203.69 3330,5230 ; P7.1 3330,5230
GND: AT1.2 C1.1 C2.1 C3.1 C4.1 C5.1 C6.1 C7.1 C8.1 C9.1 C10.1 C11.1 C12.1 C13.1 C14.1 C15.1 C16.1 C17.1 C18.1 C19.1 C20.1 C21.1 C22.1 C23.1 C24.1 C25.1 C26.1 C27.1 J1.2 J2.1 J2.3 JST1.2 JST1.S1 JST1.S2 LDO1.1 LDO1.2 P1.3 P1.4 P3.1 P4.1 P4.2 P5.1 P5.2 P6.1 P7.11 P7.12 P8.7 P8.8 P9.5 P9.6 P10.3 P10.4 P11.7 P11.8 PM1.5 PM1.8 PM1.17 R4.1 R5.1 R6.1 R8.1 R9.1 R10.1 R11.2 R14.1 R15.1 R17.1 R23.1 R26.2 SW2.3 SW2.4 TP5.1 U1.14 U1.15 U1.16 U1.37 U1.49 U2.5 U2.10 U2.12 U2.16 U3.7 U4.GND USB1.5 USB1.6 USB1.7 USB1.8 USB1.9 X2.2 | length 4660.4
  Top Layer w10: v1@3140.31,4218.31 U2.16 ; v1(3179,5642) 3190.82,5630.18 3190.82,5600.62 C27.1 ; U2.12 v1@3214.87,4327.87 ; v1@3228.16,4855.16 U3.7 ; U2.10 v1@3254.25,4326.25 ; v1@3273.93,4134.07 U2.5 ; v1(3350,5090) 3350,5077.44 C4.1 ; R23.1 v1(3393,3378) ; v1(3722,4485) v1(3722,4551) ; v1(3726,5188) 3726,5100 v1(3727,5099) ; v1(3731,4399) 3787,4399 v1(3802,4414) ; v1(3732,3806) 3732,3743 v1(3736,3739) ; v1(3745,3618) v1(3745,3682) ; v1(3769,3580) 3779.42,3569.58 SW2.3 ; SW2.4 3779.42,3119.58 v1(3791,3108) ; v1(3811,5192) 3811,5104 v1(3815,5100) ; v1(3832,4179) 3859,4179 v1(3888,4150) ; v1(3859,4293) 3859,4287 v1(3919,4227) ; J1.2 3861,4005 v1(3864,4008) ; v1(3918,4118) 3920,4118 v1(3971,4067) ; v1(3960,4179) v1(4020,4119) ; v1(3992,3281) 3993,3282 v1(4061,3282) ; v1(4024,4230) 4025,4230 v1(4076,4179) ; v1(4309,4163) v1(4394,4163) ; v1(4320,4073) v1(4384,4073) ; v1(4330,3596) 4338.88,3596 R15.1 ; v1(4408,4364) 4408,4266 v1(4409,4265) ; v1(4425,3837) 4434,3828 4473,3828 v1(4488,3813) ; v1(4430,5895) 4431,5894 JST1.S2 ; v1(4482,5203) 4486,5207 C2.1 ; v1(4532,5623) 4565.74,5656.74 JST1.2 ; v1(4533,5120) R6.1 ; R4.1 4536.76,5329.76 v1(4537,5330) ; v1(4588,3332) C23.1 ; v1(4596,3683) v1(4676,3683) ; v1(4608,5436) 4608.44,5435.56 R10.1 ; v1(4640,3339) 4648,3347 C24.1 ; X2.2 4659.06,3191.94 v1(4666,3185) ; R9.1 4732.44,5454.44 v1(4733,5455) ; JST1.S1 v1(4779,5894) ; v1(4738,3221) 4748,3231 C18.1 ; AT1.2 v1(4754,2923) v1(4754,2999) ; C1.1 v1(4794,5455) ; v1(4822,3310) 4824.53,3310 4851.37,3336.84 C22.1 ; v1(4823,4059) 4824,4058 R14.1 ; v1(4837,4163) 4925,4163 v1(4927,4165) ; 4839.26,3376.43 U1.14@4839.26,3399 ; R5.1 v1(4875,5322) ; v1(4887,3893) 4890,3890 C14.1 ; v1(4942,3241) C25.1 ; C13.1 4945,3882 v1(4957,3894) ; C26.1 5063.88,3283.88 v1(5065,3285) ; U1.37 5093.65,3670.65 v1(5108,3685) ; C3.1 5044,5066 v1(5046,5066) ; C7.1 5053.56,3790.56 v1(5054,3791) ; C12.1 5058,3858.44 v1(5058,3908) ; C8.1 v1(5113,3847) ; v1(5155,5545) 5157,5547 R8.1 ; C9.1 v1(5163,3844) ; v1(5209,3477) C10.1 ; v1(5210,3809) v1(5285,3809) ; v1(5212,3737) v1(5284,3737) ; C11.1 5274,3472 v1(5277,3469) ; v1(5329,4635) C19.1 ; v1(5486,3779) 5518,3811 v1(5518,3837) ; v1(5492,4540) C21.1 ; v1(5545,4227) 5547,4227 v1(5623,4303) ; v1(5567,5311) 5567.44,5311.44 R11.2 ; v1(5580,3711) 5585,3711 v1(5629,3755) ; C20.1 5623.56,5039.56 v1(5624,5040) ; LDO1.2 5645,4932 v1(5646,4933) ; LDO1.1 v1(5695,4934) ; v1(5702,3833) C17.1 ; R26.2 v1(5745.56,4550.44) ; v1(5773,3830) C15.1 ; v1(5846,3832) C16.1 ; TP5.1 v1(5982,4120)
  Top Layer w12: U1.14@4839.26,3399 U1.15 U1.16
  Top Layer w20: v1(3086,4114) C6.1 ; v1(3140,4218) v1@3140.31,4218.31 ; v1@3214.87,4327.87 v1(3215,4328) ; v1(3222,4849) v1@3228.16,4855.16 ; v1(3249,5807) 3251.03,5804.97 U4.GND ; v1@3254.25,4326.25 v1(3255,4327) ; v1(4647,5158) 4647,5162.56 PM1.5@4677.44,5193 ; PM1.8@4741.44,5193 4768.13,5166.31 4781.69,5166.31 v1(4786,5162) ; v1(4804.83,3342) 4839.26,3376.43 ; v1(5325,3300) 5325,3239.07 J2.1 ; v1(5328,3059) J2.3 ; v1(5455,5690) 5455,5720.25 USB1.5
  other v1: 6034,2928 3750,2930 4652,2930 5806,2930 5918,2930 3304,2932 3413,2932 3526,2932 3634,2932 4206,2932 4315,2932 4428,2932 4536,2932 5360,2932 5469,2932 5582,2932 5690,2932 3081,2934 3191,2934 3983,2934 4093,2934 5137,2934 5247,2934 2957,2936 3859,2936 5013,2936 4652,2998 4206,3000 4315,3000 4428,3000 4536,3000 3983,3002 4093,3002 3859,3004 6034,3005 3752,3007 5806,3007 5918,3007 3306,3009 3415,3009 3528,3009 3636,3009 5360,3009 5469,3009 5582,3009 5690,3009 3083,3011 3193,3011 5137,3011 5247,3011 2959,3013 5013,3013 5018,3438 4835,3439 4885,3441 4928,3441 4976,3441 4836,3482 5020,3482 5018,3526 4836,3528 4926.21,3534.83 5018,3578 4835,3579 4926,3625 4879,3626 4835,3627 5021,3628 4975,3629 3276,4132 3389.56,4261 3337.44,4376 4709.44,5251 5378.09,5852 5480.45,5852 5571,5852 5673.36,5852
GPIO0: P5.4 U1.44 | length 311.2
  Top Layer w10: P5.4 4718,3865 4816,3767 4838,3767 4896.69,3708.32 U1.44
GPIO1: P5.3 U1.45 | length 349.6
  Top Layer w10: P5.3 4668,3845 4764,3749 4830,3749 4877,3702 U1.45
HFXTAL_N: U1.10 X2.3 | length 287.1
  Top Layer w10: X2.3 4659.06,3323.06 4693,3357 4693,3430 4728.93,3465.93 U1.10
HFXTAL_P: U1.11 X2.1 | length 481.2
  Top Layer w10: X2.1 4653.76,3154 4683,3154 4711,3182 4711,3412 4745.24,3446.24 U1.11
I2C0_SCL: P6.4 P7.8 P8.6 P11.6 R12.1 U1.47 | length 3435.3
  Top Layer w10: P11.6 3716,5652 3761,5607 3761,5071.44 P7.8 3566,4876.44 3566,4570 3584,4552 3584,4220.56 P8.6 3632.56,4183.88 3706.67,4258 3789,4258 ; R12.1 3789,4240.56 3789,4258 ; v1(4448,3803) 4286,3803 4258,3831 4258,3943 4140,4061 4011,4061 3814,4258 3789,4258 ; P6.4 4532,3830 4644,3830 4748,3726 4815,3726 4837.63,3703.37 U1.47
  Bottom Layer w10: v1(4448,3803) 4448,3868 4445,3871 P6.4
I2C0_SDA: P6.3 P7.10 P8.4 P11.4 R13.1 U1.48 | length 3333.8
  Top Layer w10: P11.4 3696,5752 3784,5664 3784,4928 3686,4830 P7.10 3696,4753.56 3696,4298 3670,4272 ; P8.4 3670,4272 ; R13.1 3808,4288 3822,4274 ; U1.48 4817.94,3698.06 4809,3707 4730,3707 4624,3813 4524,3813 4493,3844 4468,3844 P6.3 4418,4075 4397,4096 4000,4096 3822,4274 ; 3670,4272 3672,4274 3822,4274
LFXTAL_N: U1.36 X1.2 | length 98
  Top Layer w10: U1.36 5155.69,3643.09 X1.2
LFXTAL_P: U1.35 X1.1 | length 228.4
  Top Layer w10: U1.35 5100.77,3623.41 5132.58,3591.6 5208.81,3591.6 X1.1
MCU_RESET: LDO1.8 R24.2 | length 64.9
  Top Layer w10: LDO1.8 5719,4667 R24.2
NetAT1_1: AT1.1 L4.2 | length 197.1
  Top Layer w10: AT1.1 4909,2864 L4.2
NetC6_2: C6.2 U2.2 | length 89.3
  Top Layer w10: C6.2 3214.87,4151.31 U2.2
NetC10_2: C10.2 C11.2 R20.2 U1.34 | length 291.2
  Top Layer w10: U1.34 5097.28,3603.72 5125.4,3575.6 5196.52,3575.6 C10.2 C11.2 R20.2
NetC13_2: C13.2 U1.41 | length 144.8
  Top Layer w10: C13.2 4946,3810 4946,3747 4955.74,3737.26 U1.41
NetC22_2: C22.2 L3.2 R27.1 R28.1 | length 310.6
  Top Layer w10: C22.2 4891.06,3299.63 L3.2 4891.37,3227.19 R27.1 4915.56,3203 5010.44,3203 R28.1
NetC23_2: C23.2 C24.2 L5.2 U1.9 | length 279
  Top Layer w10: L5.2 4545.54,3425.56 C23.2 4589,3426.56 C24.2 4707.06,3485.61 U1.9
NetC25_2: C25.2 C26.2 L6.2 U1.18 | length 191.7
  Top Layer w10: U1.18 4916.37,3364.63 C25.2 C26.2 5055.98,3339 L6.2
NetD1_2: D1.2 R1.2 | length 86.5
  Top Layer w10: R1.2 4752.56,5083 4811.44,5083 D1.2
NetD2_2: D2.2 R3.2 | length 81.1
  Top Layer w10: D2.2 4875.88,5182 R3.2
NetD3_2: D3.2 R14.2 | length 101.4
  Top Layer w10: D3.2 4818,3964.44 R14.2
NetD4_2: D4.2 R15.2 | length 54.4
  Top Layer w10: R15.2 4422,3570 D4.2
NetFUSE1_1: FUSE1.1 SD1.C | length 195.2
  Top Layer w20: SD1.C 5897.5,5455.06 FUSE1.1
NetFUSE1_2: FUSE1.2 USB1.1 | length 417.1
  Top Layer w20: USB1.1 5636.16,5680.54 FUSE1.2
NetJ2_2: J2.2 R28.2 | length 163.3
  Top Layer w12: R28.2 5243.96,3154 J2.2
NetL1_1: L1.1 U1.38 | length 519.4
  Top Layer w10: U1.38 5014.8,3693.8 5029,3708 5228,3708 v1(5236,3708) ; L1.1 5240,3909.32 v1(5240,3871)
  Bottom Layer w10: v1(5236,3708) 5238,3708 5240,3710 v1(5240,3871)
NetL2_2: L2.2 R20.1 | length 91.4
  Top Layer w10: L2.2 5391.56,3584.42 R20.1
NetL3_1: L3.1 U1.17 | length 62.5
  Top Layer w10: L3.1 4896.69,3344 U1.17
NetL4_1: L4.1 R27.2 | length 80.8
  Top Layer w10: R27.2 4892,3114.68 L4.1
NetLDO1_7: LDO1.7 R25.2 R26.1 | length 157.8
  Top Layer w10: LDO1.7 5645,4614.12 R25.2 5703.56,4605.12 R26.1
NetP2_1: P2.1 SD1.A | length 180.3
  Top Layer w12: SD1.A 5933.5,5286.94 P2.1
NetPM1_1: PM1.1 R4.2 | length 67
  Top Layer w10: R4.2 4633.44,5299 PM1.1
NetPM1_4: PM1.4 R6.2 | length 80
  Top Layer w10: 4590.88,5174 4604.44,5174 PM1.4
NetPM1_6: PM1.6 R7.2 | length 54.6
  Top Layer w10: R7.2 4699.44,5140.44 PM1.6
NetPM1_7: PM1.7 R1.1 | length 76.3
  Top Layer w10: PM1.7 4719.44,5166.58 4742,5144.02 R1.1@4742,5126
NetPM1_9: PM1.9 R3.1 | length 65.7
  Top Layer w10: PM1.9 4790.76,5221 R3.1
NetPM1_12: PM1.12 R5.2 | length 55.8
  Top Layer w10: PM1.12 4811.88,5281 R5.2
NetPM1_14: PM1.14 R9.2 | length 60.4
  Top Layer w10: PM1.14 4722.44,5312 4722.44,5329.56 4732.44,5339.56 R9.2
NetPM1_16: PM1.16 R10.2 | length 87.8
  Top Layer w10: R10.2 4639,5349.44 PM1.16
NetR2_1: R2.1 SW1.1 | length 138.5
  Top Layer w10: R2.1 4959.57,5629.13 SW1.1
NetR8_2: R8.2 SW1.3 | length 136.5
  Top Layer w10: SW1.3 5156.43,5631.13 R8.2
NetR11_1: R11.1 USB1.4 | length 359.1
  Top Layer w10: USB1.4 5500.13,5475.87 R11.1
NetR16_1: R16.1 R17.2 U2.7 | length 111.4
  Top Layer w10: U2.7 3311.44,4238 R17.2 3334.44,4312.44 R16.1
PAVDD: L6.1 R18.2 R19.2 | length 1354
  Top Layer w10: L6.1@5085.02,3336 L6.1 5338,3334 5632,3628 v1(5632,3710) ; R19.2 5332.44,3983.56 5398.88,3917.12 R18.2 5456,3876.24 v1(5456,3805)
  Bottom Layer w10: v1(5456,3805) 5458,3807 5528,3807 5625,3710 v1(5632,3710)
RADIO_#RESET: C18.2 J1.3 R22.1 SW2.1 SW2.2 U1.12 | length 1837.7
  Top Layer w10: J1.3 3910,3774 3910,3571.72 SW2.1 4027,3454.72 v1(4027,3346) ; v1(4027,3259) 3956.58,3188.58 SW2.2 4058.31,3166.87 R22.1 4175.56,3121 4675.88,3121 4785,3230.12 4785,3263.56 C18.2 4748,3384.17 U1.12
  Bottom Layer w10: v1(4027,3259) v1(4027,3346)
S1_3V3: C5.2 P8.1 R16.2 U2.1 U2.14 | length 1508.1
  Top Layer w10: 3159.31,4257.69 U2.14 ; 3165.39,4158 U2.1
  Top Layer w20: 3159.31,4257.69 3119,4298 3119,4409 3177,4467 ; 3165.39,4158 3100,4158 3089,4169 3089,4467 3177,4467 ; R16.2 3414,4338 3498.56,4338 P8.1 ; C5.2 P8.1@3528.56,4376 ; P8.1@3532.56,4347 P8.1 ; 3177,4467 3437.56,4467 P8.1@3528.56,4376 ; P8.1@3528.56,4376 P8.1
S2_3V3: C27.2 P11.1 U4.VDD | length 947.5
  Top Layer w20: U4.VDD 3251.03,5598.47 C27.2 3249.56,5573.56 3228,5552 3163,5552 3142,5573 3142,5870 3207,5935 3445.56,5935 P11.1
S3_3V3: C4.2 P7.3 U3.8 | length 416.3
  Top Layer w10: U3.8 3248.16,4947.84
  Top Layer w20: 3248.16,4947.84 3267.87,4967.56 3388.56,4967.56 3431.56,5010.56 C4.2 3440.56,5051 P7.3
S4_3V3: P9.1 SW3.3 SW3.4 | length 658.8
  Top Layer w10: SW3.4 2950,3740.72 2950,3765 2993,3808 3236.72,3808 SW3.3
  Top Layer w20: SW3.3 3310.13,3742.58 3310.13,3796.58 3454.42,3796.58 P9.1
S4_GPIO: P9.3 R23.2 SW3.1 SW3.2 TP11.1 | length 911
  Top Layer w10: SW3.2@2945.87,3562.42 2945.87,3463.13 TP11.1 3269.44,3404 R23.2 3304.13,3386.69 3304.13,3559.42 SW3.1 3306.13,3603.13 3382,3679 P9.3
SCL_FDC: P7.7 TP7.1 U3.10 | length 414.2
  Top Layer w10: U3.10 3491.64,4902.08 ; TP7.1 3393.56,4804 3491.64,4902.08 ; P7.7 3491.64,4902.08
SCL_MMA: P8.5 TP10.1 U2.4 | length 630.4
  Top Layer w10: U2.4 3251.46,4185.01 3251.46,4161.05 3241,4150.59 3241,4042 3254,4029 3345,4029 ; TP10.1 3345,3993 3345,4029 ; P8.5 3503,4172 3470,4139 3470,4051 3448,4029 3345,4029
SCL_Si7021: P11.5 TP13.1 U4.SCL | length 434.3
  Top Layer w10: U4.SCL 3385,5650.37 ; TP13.1 3434.56,5558 3526.93,5650.37 3385,5650.37 ; 3384.56,5649.93 3385,5650.37
SDA_FDC: P7.9 TP8.1 U3.9 | length 662.4
  Top Layer w10: TP8.1 3370,4671 3440,4741 ; U3.9 3268.16,4758.84 3286,4741 3440,4741 ; P7.9 3519.56,4820.56 3440,4741
SDA_MMA: P8.3 TP9.1 U2.6 | length 424.1
  Top Layer w10: U2.6 3478.87,4218.31 ; TP9.1 3378,4117.44 3478.87,4218.31 ; P8.3 3478.87,4218.31
SDA_Si7021: P11.3 TP14.1 U4.SDA | length 528.8
  Top Layer w10: U4.SDA 3290.4,5808 3410,5808 3466,5752 P11.3 3416.56,5864 TP14.1
SYSOFF: PM1.15 SW1.2 | length 978.2
  Top Layer w10: PM1.15 4699.44,5329.56 4690,5339 4690,5501 4712,5523 5031,5523 5058,5550 SW1.2
TP_TCK_SWCLK: J1.8 U1.1 | length 1076.5
  Top Layer w10: J1.8 4011,3999 4043,4031 4114,4031 4240,3905 4240,3804 4268,3776 4624,3776 4756.91,3643.09 U1.1
TP_TDO_SWO: J1.6 U1.3 | length 1042
  Top Layer w10: J1.6 3961,3889 3995,3855 4155,3855 4273,3737 4599,3737 4631,3705 v1(4631,3709) ; v1(4633,3634) 4663.28,3603.72 U1.3
  Bottom Layer w10: v1(4631,3709) 4633,3707 v1(4633,3634)
TP_TMS_SWDIO: J1.7 U1.2 | length 873.8
  Top Layer w10: J1.7 4011,3721 4072,3660 4699,3660 4735.59,3623.41 U1.2
UIF_BUTTON0: P4.4 P9.4 U1.7 | length 1321.2
  Top Layer w10: P9.4 3597,3654 v1(3666,3654) ; v1(3947,3648) 3974,3648 4109,3513 P4.4 4218,3521.61 4787.02,3521.61 U1.7
  Bottom Layer w10: v1(3666,3654) 3668,3652 3956,3652 3959,3649 3958,3648 v1(3947,3648)
UIF_BUTTON1: P4.3 U1.8 | length 589.9
  Top Layer w10: P4.3 4493,3463 4535.3,3505.3 U1.8
UIF_LED0: D3.1 U1.43 | length 179.2
  Top Layer w10: D3.1@4825,3810 4838,3797 4838,3798 4916.37,3719.63 U1.43
UIF_LED1: D4.1 U1.6 | length 270.8
  Top Layer w10: D4.1 4555.45,3544.67 U1.6
V_BATBYPASS: C2.2 JST1.1 P3.2 PM1.2 PM1.3 R2.2 TP2.1 | length 1945.7
  Top Layer w10: PM1.3 4617.12,5241 4617.12,5250.12 4628,5261 PM1.2
  Top Layer w20: P3.2 4201,5883 4151,5833 4151,5601 TP2.1 ; 4617.12,5241 C2.2 4583.12,5222.88 4555,5251 4501,5251 TP2.1 ; R2.2 4863.56,5573.44 4769.38,5667.62 JST1.1 4644.48,5599.48 4529,5484 TP2.1
V_REGOUT: C19.2 C21.2 LDO1.5 LDO1.6 P10.1 R24.1 R25.1 TP12.1 | length 1337.8
  Top Layer w20: P10.1 5431.53,4617.53 C19.2 5485,4635 C21.2 ; LDO1.5 5545,4681 C21.2 ; LDO1.6 5595,4657 5566,4628 ; R25.1 5633,4553 5590,4553 5566,4577 5566,4628 ; R24.1 5805.12,4517 ; TP12.1 5842.12,4480 5805.12,4517 ; C21.2 5545,4628 ; 5545,4628 5543,4626 5543,4497 5564,4476 5781,4476 5805.12,4500.12 5805.12,4517 ; 5545,4628 5566,4628
V_USB: C1.2 P2.2 PM1.13 TP3.1 | length 1502.1
  Top Layer w10: TP3.1@6131.44,5151 TP3.1
  Top Layer w20: PM1.13@4743.44,5312 4743.44,5312.88 C1.2 5400.56,5363.44 5613,5151 P2.2 TP3.1@6131.44,5151
VBC: C3.2 D1.1 D2.1 P1.1 PM1.10 PM1.11 R7.1 | length 909
  Top Layer w10: PM1.11 PM1.10 4921,5241
  Top Layer w20: R7.1 4698,5030 4738,4990 4838,4990 4882.56,5034.56 D1.1 4880,5069.56 D2.1 4939,5190 ; 4921,5241 4939,5223 4939,5190 ; P1.1 5149,5163 C3.2 4966,5163 4939,5190
VDCDC: C7.2 C12.2 L1.2 L5.1 R19.1 U1.40 | length 3992.9
  Top Layer w10: U1.40 4975.43,3742.98 C7.2
  Top Layer w20: v1(3860,4132) 3833,4105 3782,4105 3765,4088 3765,3710 3872,3603 3872,3369 3925,3316 4459.85,3316 L5.1@4539,3395.15 ; v1(3916,4295) 4084,4127 4977,4127 4998.44,4105.56 C12.2@4998.44,3854 ; C7.2 5000.44,3768 C12.2 5000.44,3913.44 5119,4032 5188,4032 L1.2
  Top Layer w30: L1.2 5282,4126 5363.12,4126 5387.56,4101.56 R19.1
  Bottom Layer w20: v1(3860,4132) 3860,4229 3916,4285 v1(3916,4295)
VLDO_IN: C20.2 LDO1.3 LDO1.4 P1.2 TP1.1 | length 803.3
  Top Layer w20: P1.2 5438,5164 ; TP1.1 5405,5131 5438,5164 ; LDO1.4 5545,4983.44 ; LDO1.3 C20.2@5595,4983.44 ; C20.2 C20.2@5595,4983.44 ; 5438,5164 5520,5082 5520,4994 5529.56,4984.44 5546,4984.44 5545,4983.44 ; 5545,4983.44 C20.2@5595,4983.44
VMCU: C8.2 C9.2 C14.2 J1.1 L2.1 R18.1 R21.2 R22.2 TP4.1 U1.39 U1.42 | length 6131.5
  Top Layer w10: 4883,3968 4852,3937 4852,3848 C14.2 4890,3773 4936.06,3726.94 U1.42 ; U1.39 4995.11,3702.11 5020,3727 5074.05,3727 5099.05,3752 5101.12,3752 C8.2 ; L2.1 5407.65,3656.02 5424.67,3639 5463,3639 5480.02,3656.02
  Top Layer w20: v1(3709,3775) 3708,3774 3708,3099 3744,3063 4009.56,3063 R22.2 ; v1(3793,3775) J1.1 3861,3809 3794,3876 3794,4006 3861,4073 3927,4073 v1(3923,4069) ; v1(4103,4250) 4104,4250 4170,4316 v1(4311,4316) ; v1(4456,4314) 4882,4314 4883,4315 ; 4883,3968 v1(4883,4087) ; v1(4883,4233) 4881,4235 4881,4313 4883,4315 ; C8.2 5162.56,3763.88 C9.2 5163,3765 5318,3765 5336,3747 5507,3747 5559,3799 5559,3910.12 R18.1 R21.2 ; 5480.02,3656.02 5597.88,3773.88 R21.2 ; v1(5512,4315) 4883,4315 ; v1(5613,4235) 5671,4235 5684,4222 ; TP4.1 5760,4298 5684,4222 ; R21.2 5597.88,4135.88 5684,4222
  Bottom Layer w20: v1(3709,3775) v1(3793,3775) ; v1(3923,4069) 4103,4249 v1(4103,4250) ; v1(4311,4316) 4454,4316 v1(4456,4314) ; v1(4883,4087) v1(4883,4233) ; v1(5512,4315) 5533,4315 v1(5613,4235)
pads on no net: J1.4 J1.5 J1.9 J1.10 P7.2 P7.5 P7.6 SW1.None U1.4 U1.5 U1.13 U1.19 U1.20 U1.21 U1.22 U1.23 U1.24 U1.25 U1.26 U1.27 U1.28 U1.29 U1.30 U1.31 U1.32 U1.33 U1.46 U2.3 U2.8 U2.9 U2.11 U2.13 U2.15 U3.1 U3.3 U3.4 U3.5 U3.6 U4.NC@3 U4.NC@4 USB1.2 USB1.3 X2.4

## Polygon pours and split planes (outlines as drawn)
GND on Bottom Layer "GND Pour" (solid, pour order 4): 2806,5894 2914,6002 6175,6002 6251,5926 6249,5924 6249,3049 6108,2908 2924,2908 2914,2918 2802,3118 2804,3120 2806,3120
GND on Top Layer "GND_TP" (solid, pour order 6): 4276,4016 4292,4000 5537,4000 5537,4011 5532,4006 5532,2919 4277,2919 4261,2903

## Silkscreen, mask and mechanical layers (free items; w line width, h text height)
Top Overlay:
  drawing of 5 lines, arcs and shapes, not listed
  text "Team: Hydrated Buffs" at 4449,4830 h100
  text "Engineers: / Sanju Prakash / Sorabh Gandhi / Steve Kennedy" at 4454,4439 h100
Outline:
  lines w10: 4279,2996 4280,2995 ; 6275,6022 6276,6021
  lines w40: 2780,6022 6275,6022
  lines w50: 2780,6022 2780,2466 6276,2466 6276,6021
Mechanical 16:
  drawing of 1874 lines, arcs and shapes, not listed
  text "1" at 1627,7665 h30
  text "2" at 4487,7665 h30
  text "3" at 7367,7665 h30
  text "4" at 10237,7665 h30
  text "A" at 275,6759 h30
  text "A" at 11575,6759 h30
  text "B" at 275,4867 h30
  text "B" at 11575,4867 h30
  text "C" at 275,2957 h30
  text "C" at 11575,2957 h30
  text "ENGINEER:" at 7050,1500 h30
  text "TITLE:" at 8550,1500 h30
  text "PCB DESIGNER:" at 7050,1205 h30
  text "D" at 275,1067 h30
  text "D" at 11575,1067 h30
  text "DATE:" at 7050,900 h30
  text "PART NO.:" at 8550,900 h30
  text "REV:" at 10650,900 h30
  text "Altium Limited" at 5750,800 h30
  text ".PRINT_DATE" at 7100,780 h30
  text "12a Rodborough Rd" at 5750,700 h30
  text "Frenchs Forest" at 5750,600 h30
  text "FILE NAME:" at 7050,600 h30
  text "DWG NO:" at 8550,600 h30
  text "SCALE:" at 10650,600 h30
  text "NSW 2086" at 5750,500 h30
  text ".PCB_FILE_NAME_NO_PATH" at 7100,480 h30
  text "1" at 1627,265 h30
  text "2" at 4487,265 h30
  text "3" at 7367,265 h30
  text "4" at 10237,265 h30

## Text inside footprints (layer, text, board x,y; h text height)
J1: Top Overlay "9" at 4106.07,3740.11 h30; Top Overlay "10" at 4106.19,3900.23 h30; Top Overlay "1" at 3770.64,3739.96 h30; Top Overlay "2" at 3770.63,3900.27 h30; Mechanical 4 "9" at 4106.02,3740.14 h30; Mechanical 4 "10" at 4106.29,3900.27 h30; Mechanical 4 "1" at 3770.79,3740.04 h30; Mechanical 4 "2" at 3770.62,3900.27 h30; Mechanical 4 "9" at 4106.02,3740.14 h30; Mechanical 4 "10" at 4106.29,3900.27 h30; Mechanical 4 "1" at 3770.79,3740.04 h30; Mechanical 4 "2" at 3770.62,3900.27 h30
P1: Top Overlay "1" at 5130,5244 h30 r180; Top Overlay "2" at 5230,5264 h30 r180; Top Overlay "4" at 5230,5004 h30 r180; Top Overlay "3" at 5130,5004 h30 r180
P7: Top Overlay "12" at 3599.56,4650 h30 r180; Top Overlay "1" at 3499.56,4610 h30 r180; Top Overlay "1" at 3499.56,4650 h30 r180; Top Overlay "1" at 3499.56,5330 h30 r180; Top Overlay "2" at 3599.56,5330 h30 r180
P8: Top Overlay "2" at 3612.56,4472 h30 r180; Top Overlay "1" at 3512.56,4452 h30 r180; Top Overlay "7" at 3512.56,4012 h30 r180; Top Overlay "8" at 3612.56,4012 h30 r180
P9: Top Overlay "6" at 3552,3519 h30 r180; Top Overlay "5" at 3452,3519 h30 r180; Top Overlay "2" at 3552,3879 h30 r180; Top Overlay "1" at 3452,3859 h30 r180
P10: Top Overlay "1" at 5428,4554 h30 r90; Top Overlay "2" at 5448,4454 h30 r90; Top Overlay "4" at 5188,4454 h30 r90; Top Overlay "3" at 5188,4554 h30 r90
P11: Top Overlay "2" at 3608.56,5952 h30 r180; Top Overlay "1" at 3508.56,5932 h30 r180; Top Overlay "7" at 3508.56,5492 h30 r180; Top Overlay "8" at 3608.56,5492 h30 r180
U2: Mechanical 8 "X" at 3246.28,4237.09 h30 r90; Mechanical 8 "Y" at 3226.6,4237.08 h30 r90; Mechanical 8 "Z" at 3206.91,4235.62 h30 r90